# EAGLE board board-beta (EAGLE 7.7.0)
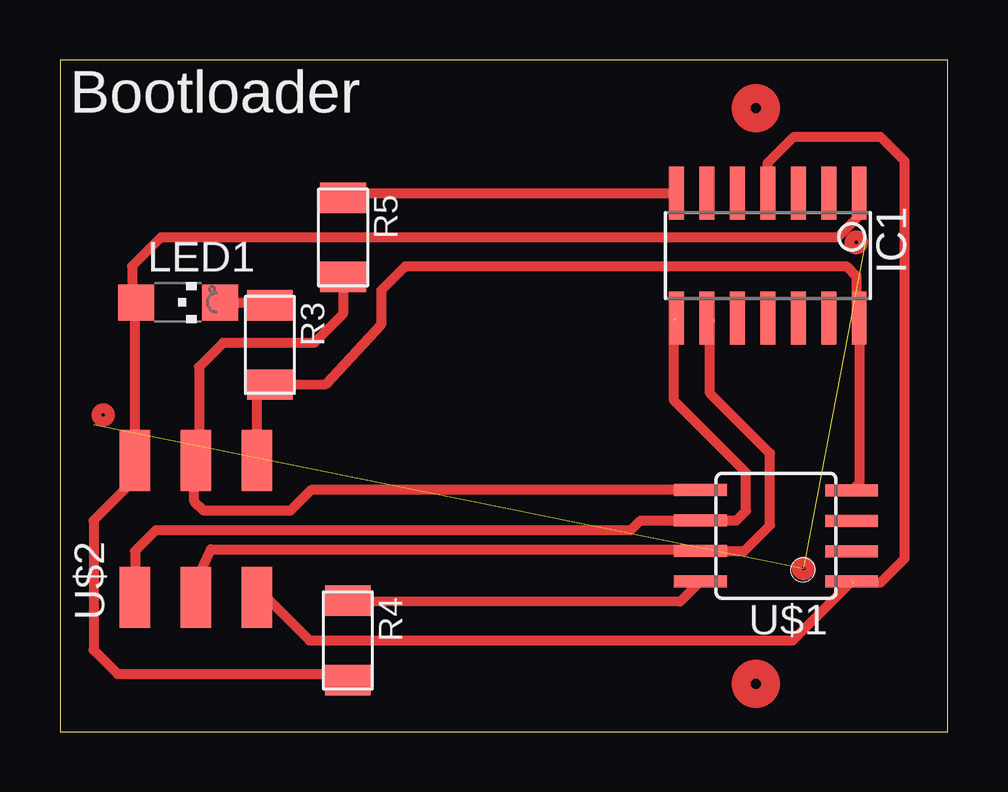
[diagram p0: board, top side]

Size 37 x 28 mm. Coordinates in mm from the lower left corner, seen from the top.
Outline: 0,0 37,0 37,28 0,28 0,0
Copper layers (1*16): Top 0.035mm / dielectric 1.5mm / Bottom 0.035mm
Design rules "board12_1_3_5v": minimum track width 10mil, minimum drill 24mil, track to track 16mil, track to pad 0.205mm, pad to pad 0.205mm, via to via 0.205mm, smd to smd 6mil, copper to edge 40mil, drill to drill 8mil, minimum pad ring 10mil, minimum via ring 8mil, stop-mask expansion 4mil, vias tented up to drill 0mil, thermal gap 10mil

## Footprints (pad centres in the part's own frame; a part is rotated, then mirrored left to right if it is on the bottom)
SOIC14 = smd 0.61 x 2.21: 1 -3.81,-2.603; 2 -2.54,-2.603; 3 -1.27,-2.603; 4 0,-2.603; 5 1.27,-2.603; 6 2.54,-2.603; 7 3.81,-2.603; 8 3.81,2.603; 9 2.54,2.603; 10 1.27,2.603; 11 0,2.603; 12 -1.27,2.603; 13 -2.54,2.603; 14 -3.81,2.603
CHIPLED_1206 = smd 1.5 x 1.5: A 0,-1.75; C 0,1.75
R1206FAB = smd 1.27 x 1.905: 1 -1.651,0; 2 1.651,0
SOIC8 = smd 0.5 x 2.2: 1 -1.905,-3.154; 2 -0.645,-3.154; 3 0.625,-3.154; 4 1.895,-3.154; 5 1.905,3.154; 6 0.635,3.154; 7 -0.635,3.154; 8 -1.905,3.154
2X03SMD = smd 2.54 x 1.27: 1 -2.857,2.54; 2 2.857,2.54; 3 -2.857,0; 4 2.857,0; 5 -2.857,-2.54; 6 2.857,-2.54

## Placement (x,y rotation side)
IC1  ATTINY44-SSU  [SOIC14]  29.51,19.85 180 top
LED1  [CHIPLED_1206]  4.92,17.89 270 top
R3  449 Ω  [R1206FAB]  8.75,16.12 270 top
R4  0 Ω  [R1206FAB]  12,3.8 270 top
R5  0 Ω  [R1206FAB]  11.8,20.6 270 top
U$1  ATTINY45SI  [SOIC8]  29.85,8.16 90 top
U$2  AVRISPSMD  [2X03SMD]  5.67,8.45 90 top

## Library data of the parts
IC1 R3-R5 U$1 U$2 = fab
LED1 = adafruit

## Nets
GND: IC1.14 R3.2 U$1.4 U$2.6
MISO: IC1.8 U$1.6 U$2.1
MOSI: R5.2 U$1.5 U$2.4
MOSI_1: IC1.7 R5.1
N$1: R4.1 U$1.8
N$3: LED1.C R3.1
RST: IC1.4 U$1.1 U$2.5
SCK: IC1.9 U$1.7 U$2.3
VCC: IC1.1 LED1.A R4.2 U$2.2

## Tracks (layer width: path | path; a pad name or v marks a point on that pad's centre or on a via)
GND
  Top 0.406: U$2.6 8.21,14.16 R3.2 11.1,14.5 13.4,17 13.4,18.4 14.4,19.4 32.8,19.4 33.2,19 33.2,17.37 IC1.14 33.32,10.37 U$1.4
MISO  (1 unrouted)
  Top 0.406: U$2.1 3.13,7.53 4,8.4 23.8,8.4 24.2,8.8 U$1.6 28.2,8.79 28.6,9.2 28.6,10.8 25.6,13.8 25.6,17.15
MOSI
  Top 0.406: U$1.5 10.46,10.06 9.6,9.2 6,9.2 5.6,9.6 5.6,11.4 | 5.6,11.4 5.6,11.6 5.8,11.8 | R5.2 11.8,17.4 10.6,16.2 6.8,16.2 5.8,15.2 5.8,11.6 | 5.8,11.6 5.8,11.44 | U$2.4 5.67,11.47 | 5.67,11.47 5.8,11.6 | 5.67,11.47 5.6,11.4
MOSI_1
  Top 0.406: R5.1 12.23,22.45 IC1.7
N$1
  Top 0.406: R4.1 25.86,5.42 U$1.8
N$2  (2 unrouted)
N$3
  Top 0.406: LED1.C 8.4,17.89 R3.1
RST  (1 unrouted)
  Top 0.406: U$2.5 8.61,5.59 10.4,3.8 30.55,3.8 U$1.1 | IC1.4 29.51,23.71 30.6,24.8 34.2,24.8 35.2,23.8 35.2,7.2 34.2,6.2 33.06,6.2
SCK
  Top 0.406: IC1.9 27.1,17.12 27.1,14.1 29.6,11.6 29.6,8.6 28.52,7.53 U$1.7 25.92,7.6 6.3,7.6 5.67,6.27 5.8,6.14 5.8,5.4 5.67,5.53 U$2.3
VCC
  Top 0.406: 12.02,2.4 2.4,2.4 1.4,3.4 1.4,8.8 3.13,10.53 U$2.2 3.13,17.85 LED1.A 3,18.06 3,19.4 4.2,20.6 32.4,20.6 33.32,21.52 IC1.1 | 12.82,2.4 12.02,2.4 | 12.02,2.4 R4.2
(copper drawn outside any net)
  shapes: Top circle x5

## Text on the board
tPlace: Bootloader